# EAGLE board skyshieldv0.1 (EAGLE 7.2.0)
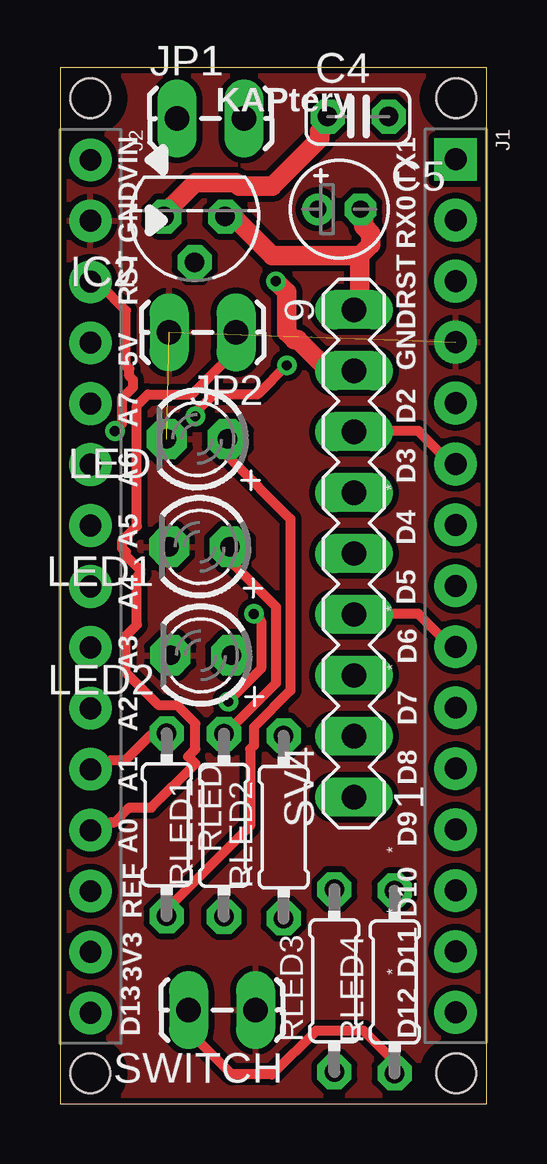
[diagram p0: board, top side]
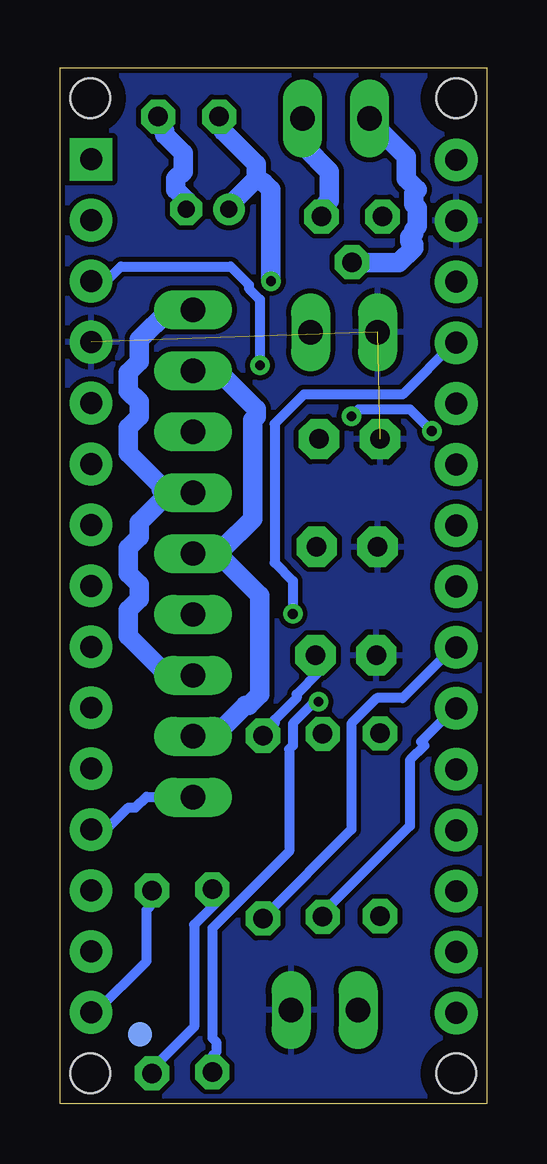
[diagram p1: board, bottom side, seen from below]

Size 17.78 x 43.18 mm. Coordinates in mm from the lower left corner, seen from the top.
Outline: 0,0 17.78,0 17.78,43.18 0,43.18 0,0
Copper layers (1*16): Top 0.035mm / dielectric 1.5mm / Bottom 0.035mm
Design rules "default *": minimum track width 8mil, minimum drill 16mil, track to track 8mil, track to pad 8mil, pad to pad 8mil, via to via 8mil, smd to smd 8mil, copper to edge 8mil, drill to drill 8mil, minimum pad ring 12mil, minimum via ring 8mil, stop-mask expansion 4mil, vias tented up to drill 18mil, thermal gap 10mil
Net classes: 0 default: width 0.406 mm, clearance 0.203 mm; 1 power: width 0.813 mm, clearance 0.203 mm
Holes 1.65 mm at 1.27,1.27 16.51,1.27 16.51,41.91 1.27,41.91
tRestrict: area 0.1,0.1 to 2.4,2.4; area 15.4,40.8 to 17.7,43.1; area 15.4,0.1 to 17.7,2.4; area 0.1,40.8 to 2.4,43.1
bRestrict: area 15.4,0.1 to 17.7,2.4; area 0.1,0.1 to 2.4,2.4; area 0.1,40.8 to 2.4,43.1; area 15.4,40.8 to 17.7,43.1

## Footprints (pad centres in the part's own frame; a part is rotated, then mirrored left to right if it is on the bottom)
C025-024X044 = drill 0.813 octagon: 1 -1.27,0; 2 1.27,0
E1,8-4 = drill 0.711 pad 1.168: + -0.889,0 | drill 0.711 pad 1.168 octagon: - 0.889,0
TO92 = drill 0.813 octagon: 1 -1.27,0; 2 0,1.905; 3 1.27,0
HEAD15-NOSS = drill 0.914 pad 1.778 square: 1 0,0 | drill 0.914 pad 1.778: 2 2.54,0; 3 5.08,0; 4 7.62,0; 5 10.16,0; 6 12.7,0; 7 15.24,0; 8 17.78,0; 9 20.32,0; 10 22.86,0; 11 25.4,0; 12 27.94,0; 13 30.48,0; 14 33.02,0; 15 35.56,0
HEAD15-NOSS-1 = drill 0.914 pad 1.778: 1 0,0; 2 2.54,0; 3 5.08,0; 4 7.62,0; 5 10.16,0; 6 12.7,0; 7 15.24,0; 8 17.78,0; 9 20.32,0; 10 22.86,0; 11 25.4,0; 12 27.94,0; 13 30.48,0; 14 33.02,0; 15 35.56,0
1X02_LOCK_LONGPADS = drill 1.016 long: 1 -0.127,0; 2 2.667,0
LED3MM = drill 0.813 pad 1.676 octagon: A -1.27,0; K 1.27,0
0204/7 = drill 0.813 octagon: 1 -3.81,0; 2 3.81,0
MA09-1 = drill 1.016 long: 1 -10.16,0; 2 -7.62,0; 3 -5.08,0; 4 -2.54,0; 5 0,0; 6 2.54,0; 7 5.08,0; 8 7.62,0; 9 10.16,0
FIDUCIAL-1X2 = smd 1 x 1: 1 0,0

## Placement (x,y rotation side)
C4  0.1µ  [C025-024X044]  12.42,41.15 0 top
C5  10µ  [E1,8-4]  11.63,37.29 0 top
IC2  MCP1702-5  [TO92]  5.61,36.98 180 top
J1  HEAD15-NOSS  [HEAD15-NOSS]  16.48,39.37 270 top
J2  HEAD15-NOSS-1  [HEAD15-NOSS-1]  1.27,39.34 270 top
JP1  BATT  [1X02_LOCK_LONGPADS]  5,41.07 0 top
JP2  USB  [1X02_LOCK_LONGPADS]  7.21,32.16 180 top
LED  POWERLED  [LED3MM]  5.71,27.71 180 top
LED1  POWERLED  [LED3MM]  5.82,23.22 180 top
LED2  POWERLED  [LED3MM]  5.87,18.69 180 top
RLED  1.5K  [0204/7]  4.45,11.63 270 top
RLED1  1.5K  [0204/7]  6.83,11.61 90 top
RLED2  1.5K  [0204/7]  9.32,11.53 90 top
RLED3  1.5K  [0204/7]  11.43,5.13 90 top
RLED4  1.5K  [0204/7]  13.94,5.08 90 top
SV4  [MA09-1]  12.24,22.94 90 top
SWITCH  adafruit  [1X02_LOCK_LONGPADS]  8.03,3.91 180 top
U$54  FIDUCIAL1X2  [FIDUCIAL-1X2]  14.45,2.9 0 bottom

## Library data of the parts
C4 C5 = resistor
IC2 = JeeLabs
J1 J2 = MyCON2
JP1 JP2 SWITCH U$54 = SparkFun
LED LED1 LED2 = adafruit
RLED RLED1-RLED4 = rcl
SV4 = con-lstb; OC_FARNELL: unknown; OC_NEWARK: unknown

## Nets
3V3: J2.14
+5V: J2.4 RLED3.1
A0: J2.11 RLED.1
A1: J2.10 RLED1.1
A3: J2.9 RLED2.1
A4: J2.8
A5: J2.7
A6: J2.6
A7: J2.5
AREF: J2.13
COM: J1.4 J2.2 JP2.2 LED1.K LED2.K LED.K SWITCH.1
D0/RX: J1.2
D1/TX: J1.1
D2: J1.5
D3: J1.6 SV4.7
D4: J1.7
D5: J1.8
D6: J1.9 SV4.4
D7: J1.10
D8: J1.11
D9: J1.12 SV4.1
D10: J1.13
D11/MOSI: J1.14
D12/MISO: J1.15 RLED4.2
D13/SCK: J2.15
GND [power]: C4.2 C5.- IC2.1 JP1.2 SV4.3 SV4.6 SV4.9
N$1: LED2.A RLED2.2
N$2: LED1.A RLED1.2
N$3: LED.A RLED.2
N$4: RLED3.2 RLED4.1 SWITCH.2
N$5: J2.12 JP2.1
PWR [power]: IC2.2 JP1.1
RESET: J1.3 J2.3
VCC [power]: C4.1 C5.+ IC2.3 SV4.2 SV4.5 SV4.8
VIN: J2.1

## Tracks (layer width: path | path; a pad name or v marks a point on that pad's centre or on a via)
+5V  (via drill 0.41)
  Top 0.406: v7.01,16.76 8.38,18.14 8.38,20.12 v8.08,20.42
  Bottom 0.406: RLED3.1 11.43,1.98 11.28,2.13 11.28,2.59 11.43,2.74 11.43,7.32 8.23,10.52 8.23,14.78 8.08,14.94 8.08,15.85 7.16,16.76 v7.01,16.76 | v8.08,20.42 8.08,21.79 8.84,22.55 8.84,28.35 7.62,29.57 3.5,29.57 1.37,31.7 J2.4
A0
  Top 0.406: RLED.1 4.42,15.39 3.81,15.39 2.74,14.33 2.13,14.33 1.83,14.02 1.37,14.02 J2.11
A1
  Bottom 0.406: RLED1.1 6.71,7.92 6.71,8.08 3.2,11.58 3.2,14.33 2.59,14.94 2.74,15.09 1.37,16.46 J2.10
A3
  Bottom 0.406: RLED2.1 9.3,7.77 5.64,11.43 5.64,15.85 4.57,16.92 3.5,16.92 1.37,19.05 J2.9
COM  (2 unrouted)
  pour Top (isolate 0.254): 0.25,0.25 0.25,42.93 17.53,42.93 17.53,0.25
  pour Bottom (isolate 0.203): 0.25,0.25 0.25,42.93 17.53,42.93 17.53,0.25
D3
  Top 0.406: J1.6 16.31,26.67 14.94,28.04 12.34,28.04 SV4.7
D6
  Top 0.406: J1.9 16.31,19.05 14.94,20.42 12.34,20.42 SV4.4
D9
  Bottom 0.406: J1.12 15.85,11.43 14.94,12.34 14.63,12.34 14.17,12.8 12.34,12.8 SV4.1
D12/MISO
  Bottom 0.406: J1.15 16.31,3.81 14.17,5.94 14.17,8.08 14.02,8.23 14.02,8.84 RLED4.2
GND
  Top 0.813: 12.5,35.36 12.95,35.81 12.95,36.27 12.65,36.58 12.65,37.19 C5.- | 12.5,35.36 12.5,33.38 12.34,33.22 SV4.9 | 12.5,35.36 8.84,35.36 7.32,36.88 7.01,36.88 IC2.1
  Bottom 0.813: SV4.3 12.34,17.98 13.41,17.98 14.94,19.51 14.94,20.57 14.48,21.03 14.48,21.64 14.94,22.1 14.94,23.16 14.48,23.62 14.48,24.23 13.26,25.45 12.34,25.45 SV4.6 13.56,25.6 13.56,25.76 14.94,27.13 14.94,28.19 14.48,28.65 14.48,29.26 14.94,29.72 14.94,30.48 14.48,30.94 14.48,31.85 13.26,33.07 12.34,33.07 SV4.9 | C4.2 13.56,41.15 13.56,40.69 13.41,40.54 13.41,40.39 12.65,39.62 12.65,38.86 12.95,38.56 12.95,38.1 12.5,37.64 12.5,37.34 C5.- | JP1.2 7.62,41 7.62,39.93 6.55,38.86 6.55,37.64 6.86,37.34 6.86,37.03 IC2.1
N$1
  Bottom 0.406: RLED2.2 9.3,15.39 8.84,15.85 8.84,16 7.92,16.92 7.92,17.07 7.01,17.98 7.01,18.59 LED2.A
N$2
  Top 0.406: RLED1.2 6.86,15.54 7.01,15.54 8.99,17.53 8.99,20.73 7.16,22.55 7.16,23.16 LED1.A
N$3
  Top 0.406: RLED.2 4.57,7.92 4.57,8.23 7.92,11.58 7.92,14.78 8.08,14.94 8.08,15.7 9.6,17.22 9.6,24.38 7.01,26.98 7.01,27.58 LED.A
N$4
  Top 0.406: SWITCH.2 5.49,3.81 5.49,2.9 7.16,1.22 8.84,1.22 10.67,3.05 12.65,3.05 13.87,1.83 13.87,1.37 RLED4.1
  Bottom 0.406: RLED4.1 13.87,1.37 13.87,1.52 12.19,3.2 12.19,7.47 11.28,8.38 11.28,8.69 11.43,8.84 RLED3.2
N$5
  Top 0.406: JP2.1 7.32,32.16 7.32,31.39 5.49,29.57 3.66,29.57 3.2,29.11 3.2,24.08 2.59,23.47 2.59,23.16 2.74,23.01 2.74,22.86 3.35,22.25 3.35,22.1 3.2,21.95 3.2,19.96 2.74,19.51 2.74,17.98 4.12,16.61 4.88,16.61 5.64,15.85 5.64,14.78 5.33,14.48 5.64,14.17 3.81,12.34 2.9,12.34 2.29,11.73 2.13,11.73 1.83,11.43 1.37,11.43 J2.12
PWR
  Bottom 0.813: IC2.2 5.49,35.05 3.66,35.05 3.05,35.66 3.05,35.81 3.2,35.97 3.2,36.12 3.05,36.27 3.05,36.42 2.9,36.58 2.9,37.34 3.05,37.49 3.05,37.95 2.9,38.1 3.35,38.56 3.35,39.47 4.88,41 JP1.1
RESET  (via drill 0.41)
  Top 0.406: v2.29,28.04 2.59,28.35 2.59,29.41 3.05,29.87 3.05,30.18 2.9,30.33 2.9,30.63 2.74,30.79 2.74,33.07 1.68,34.14 1.37,34.14 J2.3 | v5.64,28.65 5.64,28.8 6.4,29.57 8.23,29.57 v9.45,30.79
  Bottom 0.406: v2.29,28.04 3.2,28.96 5.33,28.96 v5.64,28.65 | v9.45,30.79 9.45,33.53 9.91,33.98 9.91,34.14 10.67,34.9 15.24,34.9 15.85,34.29 J1.3
VCC  (via drill 0.41)
  Top 0.813: IC2.3 4.42,37.03 4.42,37.19 5.64,38.41 7.32,38.41 7.47,38.25 8.84,38.25 10.82,40.23 10.82,40.54 11.12,40.84 11.12,41.15 C4.1 | v8.99,34.29 9.45,33.83 9.45,32.16 9.75,31.85 9.91,31.85 11.12,30.63 12.19,30.63 SV4.8
  Bottom 0.813: 9.6,38.56 10.67,37.49 10.67,37.34 C5.+ | 9.6,38.56 9.6,39.17 10.97,40.54 10.97,40.69 11.12,40.84 11.12,41.15 C4.1 | SV4.2 12.19,15.39 11.28,15.39 10.06,16.61 9.91,16.61 9.45,17.07 9.45,21.18 11.12,22.86 12.19,22.86 SV4.5 10.97,23.16 9.75,24.38 9.75,28.5 9.6,28.65 9.6,28.96 11.12,30.48 12.19,30.48 SV4.8 | v8.99,34.29 8.99,38.1 9.3,38.41 9.6,38.56

## Text on the board
tPlace: KAPtery | VIN | TX1 | GND | RX0 | RST | RST | 5V | GND | A7 | D2 | A6 | * | D3 | A5 | D4 | A4 | D5 | * | A3 | * | D6 | A2 | D7 | A1 | D8 | D9 | A0 | * | REF | * | D10 | 3V3 | * | D11 | D13 | D12